# Altium PCB TEST_HJ-185-REV-B.PcbDoc
Units mm, origin at the board's own origin, x right, y up, seen from the top; angles counter-clockwise.
Board outline 35 x 25 mm, 2 copper layers (Component Side, Bottom Layer), stack 0.325 mm thick; 44 components, 39 nets, 150 pads, 46 vias.
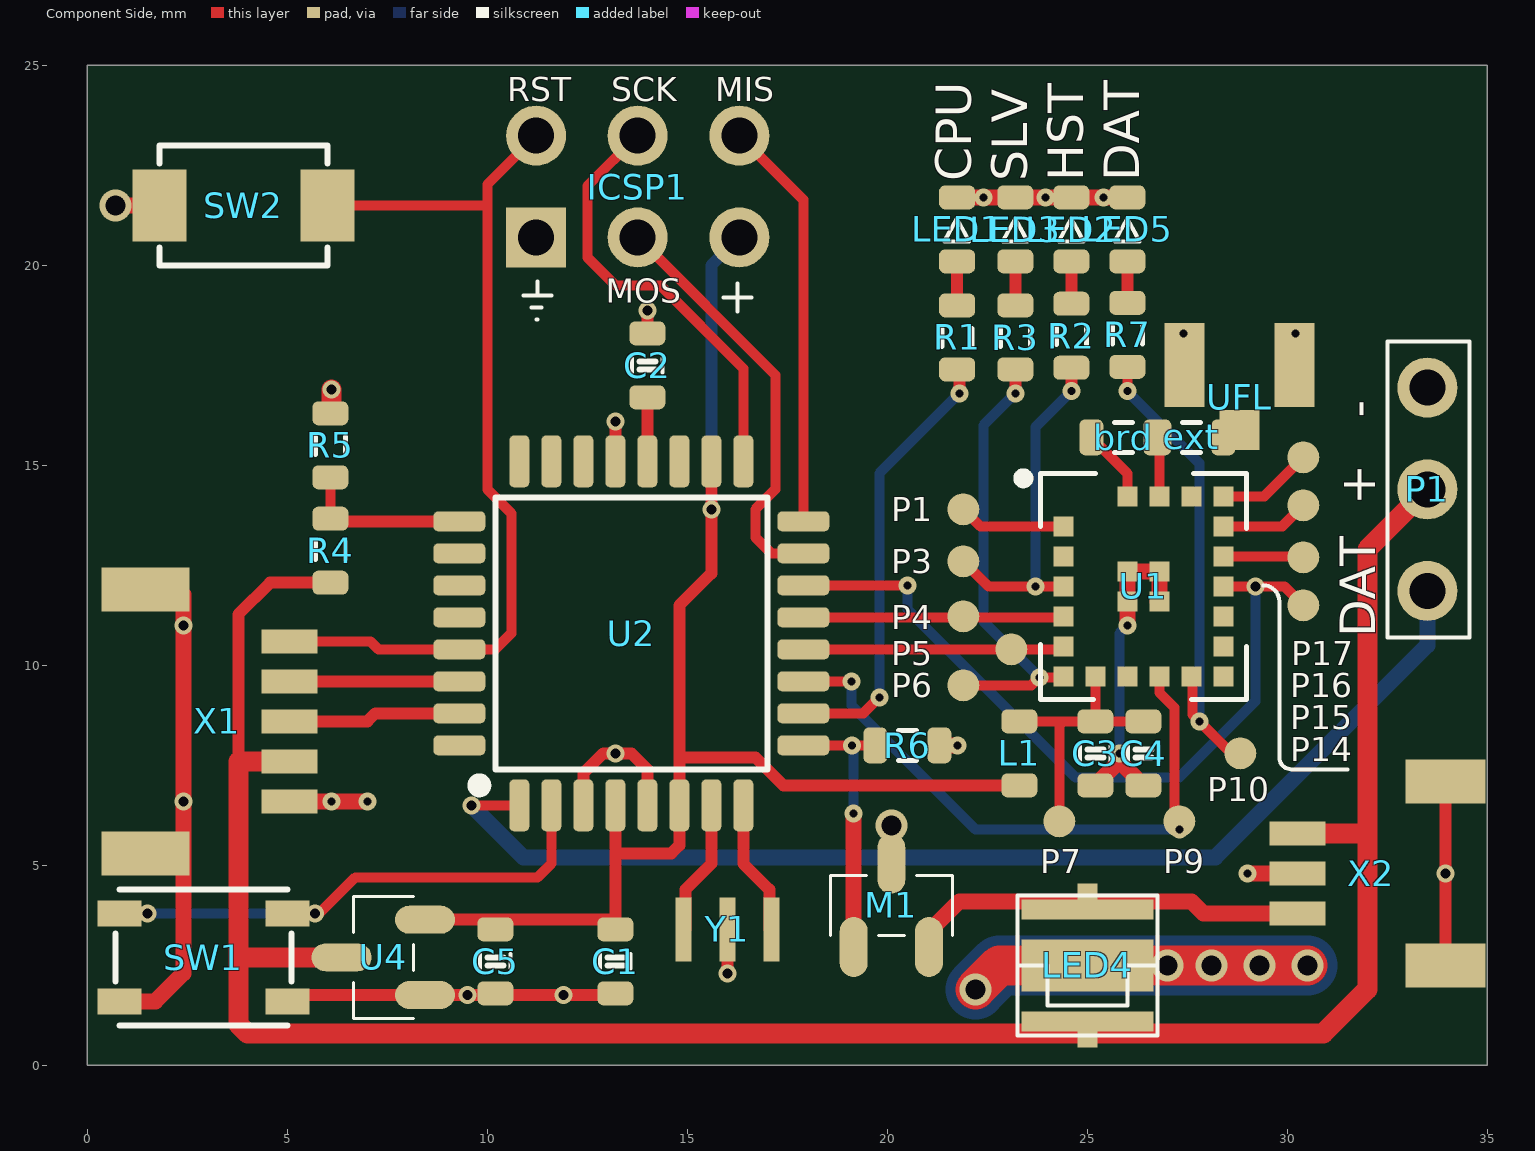
[diagram p0: Component Side view]
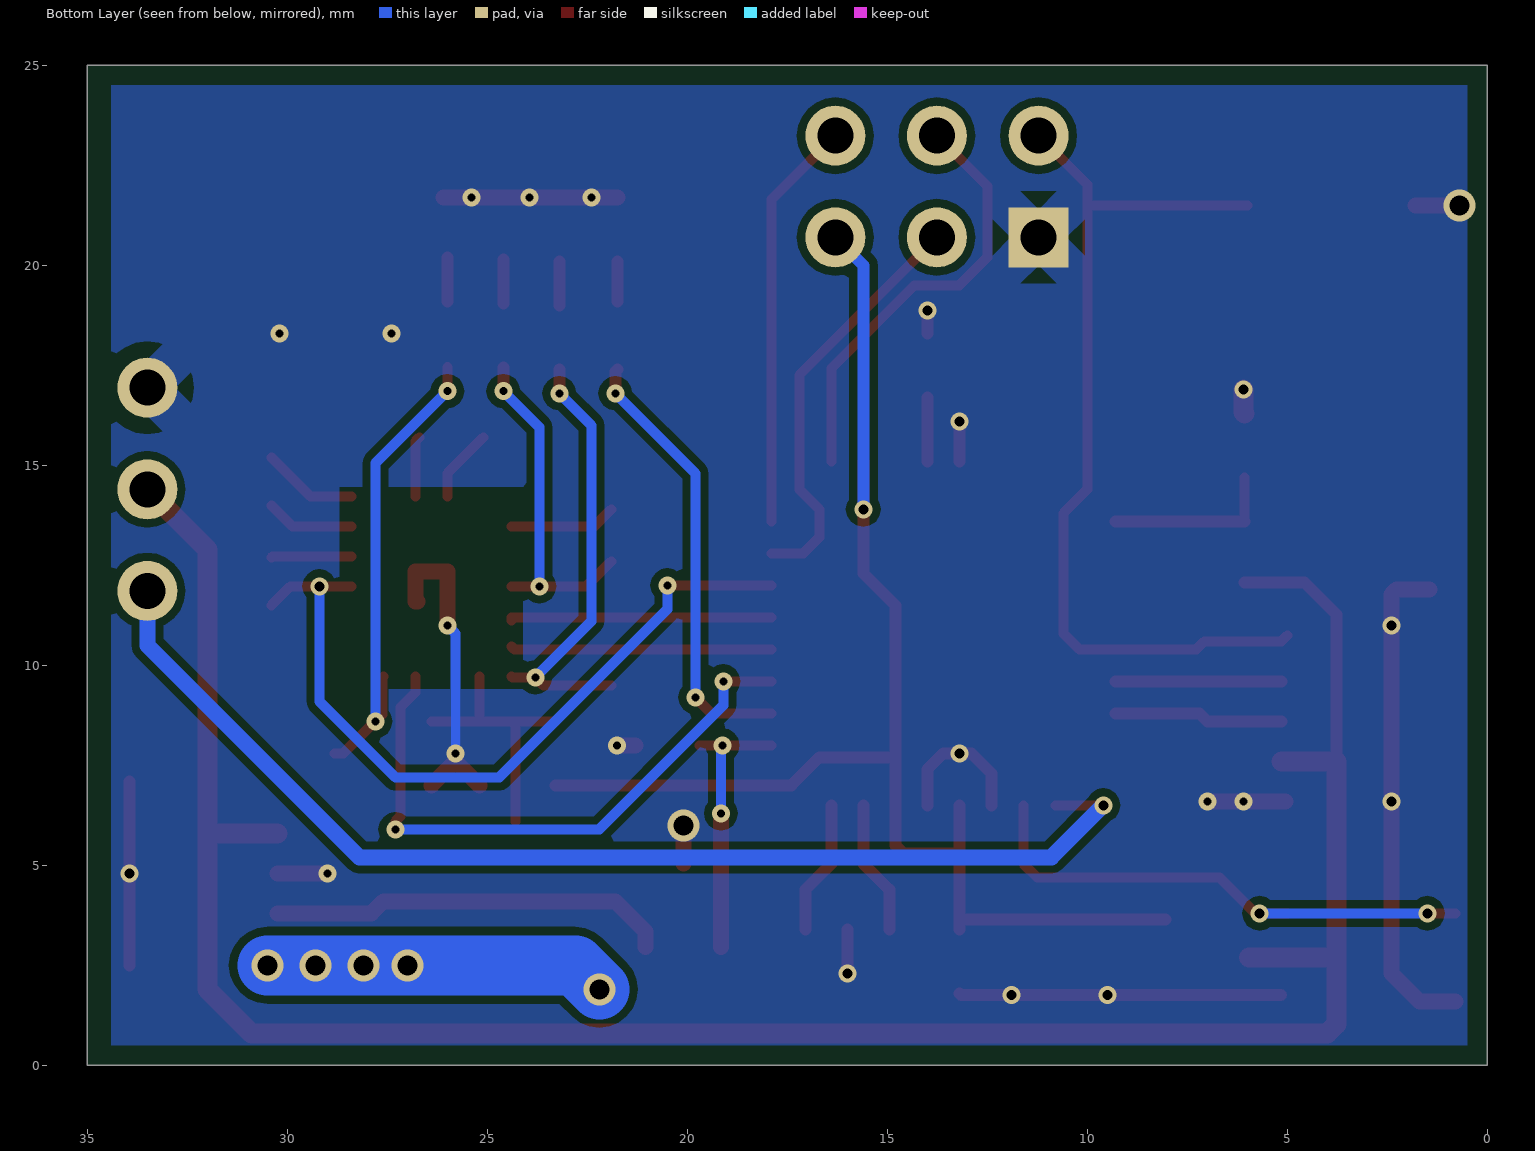
[diagram p1: Bottom Layer view, seen from below]
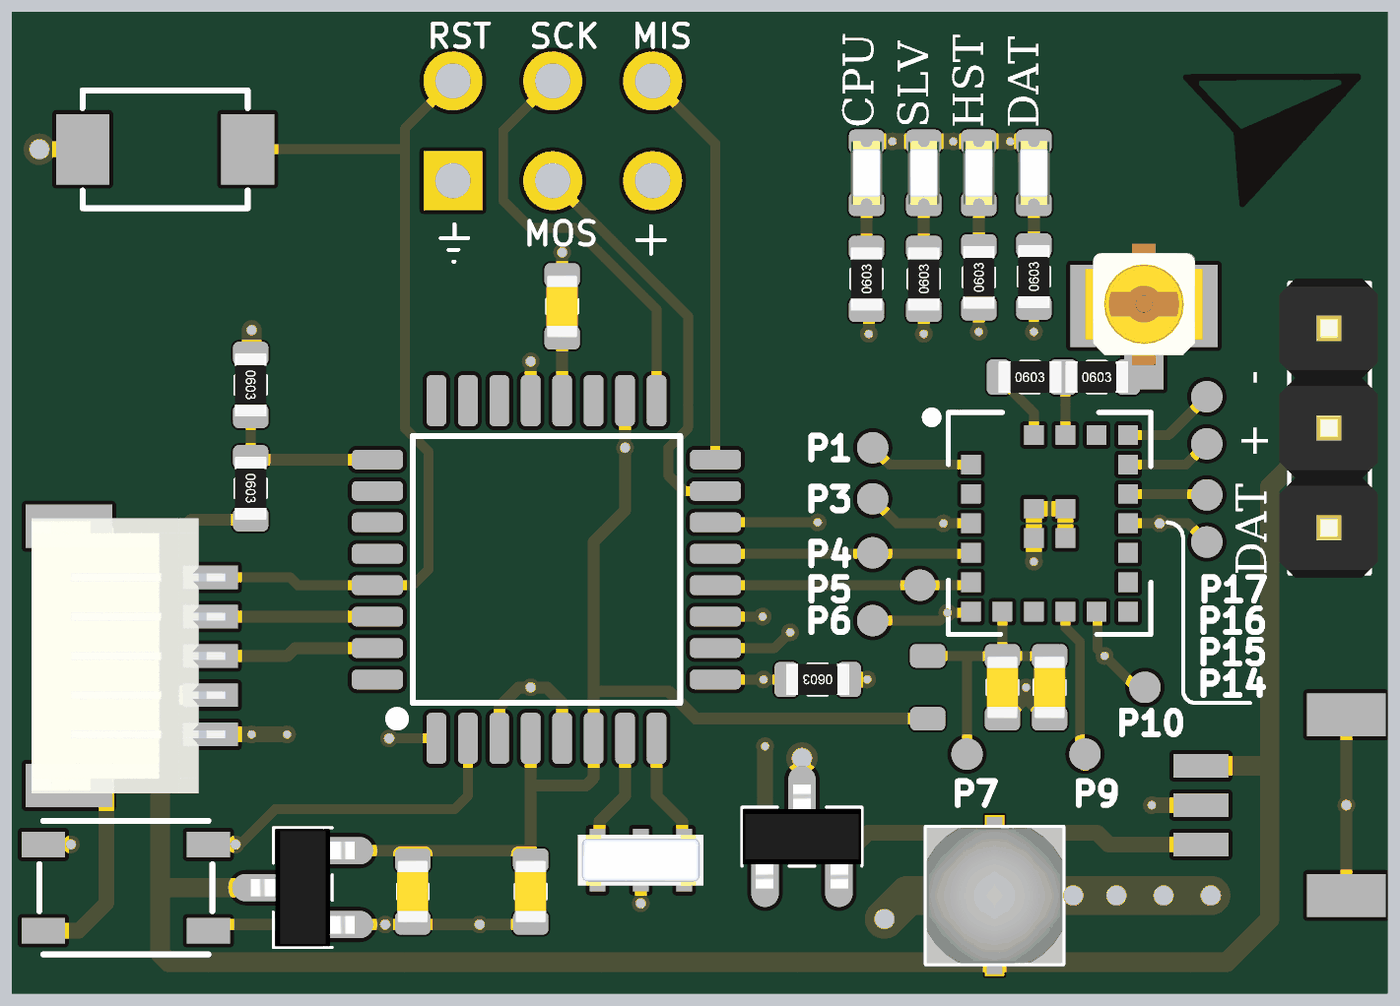
[diagram p2: 3D render of the assembled board from above, using the file's embedded part models]

## Layer stack, top to bottom
Top Solder: solder mask 0.0102, Solder Resist, Dk 3.5
Component Side: signal copper 0.0356
Dielectric 1: core 0.254, FR-4, Dk 4.2
Bottom Layer: signal copper 0.0356
Solder Side: solder mask 0.0102, Solder Resist, Dk 3.5

## Board outline
0,0 35,0 35,25 0,25

## Design rules (kind name [scope] priority, off if disabled: settings)
Clearance Clearance_GND_GND [InNet('GND') vs InNet('GND')] p1: gap=0
Clearance [All] p2: gap=0.2
ComponentClearance [All] p1: gap=0.1 collisioncheckmode=3 verticalgap=0.254 showdistances=FALSE
HoleSize [All] p1: absolutevalues=TRUE maxlimit=10 minlimit=0.025 maxpercent=80.000 minpercent=20.000
MinimumSolderMaskSliver [All] p1 off: minsoldermaskwidth=0.1
PlaneClearance [All] p1: clearance=0
PolygonConnect [All] p1: connectstyle=Relief reliefconductorwidth=0.254 reliefentries=4 polygonreliefangle="45 Angle" airgapwidth=0.254
RoutingVias [All] p1: holewidth=0.6 width=0.9 viastyle="Through Hole" minholewidth=0.3 minwidth=0.5 maxholewidth=0.9 maxwidth=1.2
SilkToSilkClearance [All] p1 off: silktosilkclearance=0.1
SilkToSolderMaskClearance SilkscreenOverComponentPads [IsPad] p1 off: minsilkscreentomaskgap=0.1 clearancetoexposedcopper=TRUE
SolderMaskExpansion [All] p1: expansion=0.102
Width [All] p1: maxlimit=10 minlimit=0.15 preferedwidth=0.3
24 further rules are at their usual default settings.

## Components (designator, comment, footprint, x,y, rotation, side; value= is the part's Value field where it differs from the comment)
brd "430R" R0603-FFT 25.9,15.7 r0 top
C1 "0.1uF" C0603-FFT 13.2,2.6 r90 top
C2 "0.1uF" C0603-FFT 14,17.5 r90 top
C3 "1uF" C0603-FFT 25.2,7.8 r90 top
C4 "0.1uF" C0603-FFT 26.4,7.8 r90 top
C5 "1uF" C0603-FFT 10.2,2.6 r90 top
ext "430R" R0603-FFT 27.6,15.7 r0 top
ICSP1 "Progr ICSP" "ICSP PRG PIN 2.54MM" 13.76,21.97 r270 top
L1 "10uH" L0603 23.3,7.8 r90 top
LED1 "Yellow" LED0603 21.743,20.9 r270 top
LED2 "Yellow" LED0603 24.6,20.9 r270 top
LED3 "Yellow" LED0603 23.2,20.9 r270 top
LED4 "Cool White" "CREE XPL" 25,2.5 r270 top
LED5 "Yellow" LED0603 26,20.9 r270 top
M1 "2.3A" SOT23-3 20.1,4 r0 top
P1 "3ipn" HDR1X3 33.5,14.4 r90 top
P1 "?" "Test Point" 21.9,13.9 r0 top
P3 "?" "Test Point" 21.9,12.6 r0 top
P4 "?" "Test Point" 21.9,11.225 r0 top
P5 "?" "Test Point" 23.1,10.4 r0 top
P6 "?" "Test Point" 21.9,9.5 r0 top
P7 "?" "Test Point" 24.3,6.1 r0 top
P9 "?" "Test Point" 27.3,6.1 r0 top
P10 "?" "Test Point" 28.825,7.8 r90 top
P14 "?" "Test Point" 30.4,11.5 r90 top
P15 "?" "Test Point" 30.4,12.7 r90 top
P16 "?" "Test Point" 30.4,14 r90 top
P17 "?" "Test Point" 30.4,15.2 r90 top
R1 "430R" R0603-FFT 21.743,18.2 r90 top
R2 "430R" R0603-FFT 24.6,18.24 r90 top
R3 "430R" R0603-FFT 23.2,18.2 r90 top
R4 "300K" R0603-FFT 6.076,12.869 r270 top
R5 "10k" R0603-FFT 6.076,15.5 r270 top
R6 "10k" R0603-FFT 20.5,8 r180 top
R7 "430R" R0603-FFT 26,18.26 r90 top
SW1 "=Value" "SWITCH TACTILE SKRPACE010" 2.9,2.7 r0 top
SW2 "=Value" "SWITCH TACTILE TS-1088C" 3.9,21.5 r180 top
U1 "BLE 5.1" LGA-24-FFT 26.4,11.975 r0 top locked
U2 "=Value" "32-PIN QFP 10MM" 13.6,10.8 r90 top
U4 "3.3v" SOT23-3 7.4,2.7 r90 top
UFL "UFL-simple" UFL 28.8,16.7 r270 top locked
X1 "1.0mm 5pin" "JST 5PIN 1MM" 3.2,8.6 r270 top
X2 "1.0mm 3pin" "JST 3PIN 1MM" 32.1,4.8 r90 top
Y1 "CSTCE8M0V53-R0" OSC_CSTCE16M0V53-R0 16,3.4 r0 top

## Footprints (in the part's own frame and the unit in brackets; to place one, negate y for a bottom-side part, rotate by r counter-clockwise, add the part's x,y. Pads: shape width x height; smd on the part's side, far side on the other; paste and mask are expansions set on the pad)
"32-PIN QFP 10MM" [mm]
  rrect50% 1.3x0.5 smd: 1(-4.3,2.8) 2(-4.3,2) 3(-4.3,1.2) 4(-4.3,0.4) 5(-4.3,-0.4) 6(-4.3,-1.2) 7(-4.3,-2) 8(-4.3,-2.8) 17(4.3,-2.8) 18(4.3,-2) 19(4.3,-1.2) 20(4.3,-0.4) 21(4.3,0.4) 22(4.3,1.2) 23(4.3,2) 24(4.3,2.8)
  rrect50% 0.5x1.3 smd: 9(-2.8,-4.3) 10(-2,-4.3) 11(-1.2,-4.3) 12(-0.4,-4.3) 13(0.4,-4.3) 14(1.2,-4.3) 15(2,-4.3) 16(2.8,-4.3) 25(2.8,4.3) 26(2,4.3) 27(1.2,4.3) 28(0.4,4.3) 29(-0.4,4.3) 30(-1.2,4.3) 31(-2,4.3) 32(-2.8,4.3)
  silkscreen extent -3.95,-3.4 3.4,3.95, body extent -3.37,-3.37 3.37,3.37, height 1
C0603-FFT [mm] "Capacitor 0603 body"
  rrect50% 0.6x0.9 smd mask+0.05: 1(-0.8,0) 2(0.8,0)
  silkscreen extent -0.18,-0.38 0.18,0.38, body extent -0.8,-0.4 0.8,0.4, height 0.86
"CREE XPL" [mm] "XPL LED"
  rect 0.5x3.3 smd paste-0.05 mask+0.05: A(1.4,0) K(-1.4,0)
  rect 0.5x0.5 smd paste-0.05 mask+0.05: A(1.8,0) K(-1.8,0)
  rect 1.3x3.3 smd paste-0.05 mask+0.05: PAD(0,0)
  silkscreen extent -1.75,-1.75 1.75,1.75, body extent -1.72,-1.72 1.73,1.73, height 2.65
HDR1X3 [mm] "Connector; Pin Header; 3 Position"
  round 1.5 hole 0.9: 1(-2.54,0) 2(0,0) 3(2.54,0)
  silkscreen extent -3.7,-1.05 3.7,1, body extent -3.81,-1.25 3.81,1.25, height 10.64
"ICSP PRG PIN 2.54MM" [mm] "pads only"
  round 1.5 hole 0.9: 1(-1.27,2.54) 2(1.27,2.54) 3(-1.27,0) 4(1.27,0) 5(-1.27,-2.54)
  rect 1.5x1.5 hole 0.9: 6(1.27,-2.54)
  silkscreen extent 2.38,-2.85 3.33,2.85
"JST 3PIN 1MM" [mm] "SMD"
  rect 0.6x1.4 smd: 1(-1,1.85) 2(0,1.85) 3(1,1.85)
  rect 1.1x2 smd: 6(-2.3,-1.85) 6(2.3,-1.85)
  body extent -2.5,-2.7 2.5,2.25, height 2.95
"JST 5PIN 1MM" [mm] "SMD"
  rect 0.6x1.4 smd: 1(-2,1.85) 2(-1,1.85) 3(0,1.85) 4(1,1.85) 5(2,1.85)
  rect 1.1x2.2 smd: 6(-3.3,-1.75) 6(3.3,-1.75)
  body extent -3.5,-2.7 3.5,2.25, height 2.9
L0603 [mm] "SMD"
  rrect50% 0.6x0.9 smd mask+0.05: 1(-0.8,0) 2(0.8,0)
  body extent -1.06,-0.37 1.06,0.38, height 0.5
LED0603 [mm] "LED 0603"
  rrect50% 0.6x0.9 smd mask+0.05: A(0.8,0) C(-0.8,0)
  silkscreen extent -0.27,-0.31 0.3,0.31, body extent -0.81,-0.4 0.81,0.4, height 0.6
LGA-24-FFT [mm] "HJ-185 FOOTPRINT"
  rect 0.5x0.5 smd: 1(-2,1.5) 2(-2,0.75) 3(-2,0) 4(-2,-0.75) 5(-2,-1.5) 6(-2,-2.25) 7(-1.2,-2.25) 8(-0.4,-2.25) 9(0.4,-2.25) 10(1.2,-2.25) 11(2,-2.25) 12(2,-1.5) 13(2,-0.75) 14(2,0) 15(2,0.75) 16(2,1.5) 17(2,2.25) 18(1.2,2.25) 19(0.4,2.25) 20(-0.4,2.25) 21(-0.4,-0.375) 21(-0.4,0.375) 21(0.4,-0.375) 21(0.4,0.375)
  silkscreen extent -3.1,-2.83 2.58,2.83, body extent -2.5,-2.75 2.5,2.75, height 1.31
OSC_CSTCE16M0V53-R0 [mm]
  rect 0.4x1.6 smd: 1(-1.1,0) 2(0,0) 3(1.1,0)
  body extent -1.6,-0.65 1.6,0.65, height 1
R0603-FFT [mm] "Resistor 0603 SMD pad"
  rrect50% 0.6x0.9 smd mask+0.05: 1(-0.8,0) 2(0.8,0)
  silkscreen extent -0.23,-0.38 0.23,0.38, body extent -0.8,-0.4 0.8,0.4, height 0.45
SOT23-3 [mm] "SOT23 3pin"
  oval 0.7x1.5 smd: 1(-0.94,-1.043) 2(0.94,-1.043) 3(0,1.043)
  silkscreen extent -1.52,-0.75 1.52,0.75, body extent -1.5,-1.32 1.5,1.32, height 1.08
"SWITCH TACTILE SKRPACE010" [mm] "white tactile switch 3.2x4.x2mm"
  rect 1.1x0.65 smd: 1(-2.1,1.1) 1(2.1,1.1) 2(-2.1,-1.1) 2(2.1,-1.1)
  silkscreen extent -2.2,-1.7 2.2,1.7, body extent -2.1,-1.6 2.1,1.6, height 2.5
"SWITCH TACTILE TS-1088C" [mm] "Tactile switch 3x4x2.5mm"
  rect 1.35x1.8 smd: 1(-2.1,0) 2(2.1,0)
  silkscreen extent -2.1,-1.5 2.1,1.5, body extent -2.6,-1.45 2.6,1.45, height 2
"Test Point" [mm] "Testpoint"
  round 0.8 smd: 1(0,0)
UFL [mm] "Connector"
  rect 1x1 smd: 1(0.812,0)
  rect 2.1x1 smd: 2(-0.813,-1.375) 3(-0.813,1.375)
  body extent -2.41,-1.5 0.69,1.5, height 1.25

## Part data
brd ext: library part R0603_430, "Resistor 0603"
C1 C2 C4: library part C0603_0.1uF_50V, "C0603_0.1uF_50V"
C3 C5: library part C0603_1uF_25V, "C0603_1uF_25V"
ICSP1: "PAD prog"
L1: library part L0603_10uH, "Inductor"
LED1 LED2 LED3 LED5: library part 19-213/Y2C-CQ2R2L/3T(CY), "LED 0603 chip"
LED4: library part XPL, "LED"
M1: library part IRLML0030, "MOSFET N-Channel"
P1: library part "Header 3x1", "Header 3x1-PIN, 2.54mm"
P1 P3 P4 P5 P6 P7 P9 P10 P14 P15 P16 P17: library part "Test Point", "Test Point"
R1 R2 R3 R7: library part R0603_430, "SMD resistor"
R4: library part R0603_300k, "SMD resistor"
R5 R6: library part R0603_10k, "SMD resistor"
SW1: library part SKRPACE010, "Switch Tactile"
SW2: library part TS-1088C-02526, "Switch Tactile"
U1: library part HJ-185MH, "Module BLE"
U2: library part "Atmega 328P-AU", "MCU"
U4: library part AP2210N-3.3TRG1, "LDO 3.3V 300mA"
UFL: library part "UFL - simple", "Connector UFL antenna"
X1: library part SM05B-FFT, "Connector 5p hor 1mm"
X2: library part SM03B-SRSS-TB, "Connector 3p hor 1mm"
Y1: "Ceramic Resonator 8Mhz"

## Via types
v1: diameter 0.45, hole 0.2, Component Side to Bottom Layer, tented both sides, 24 vias
v2: diameter 0.45, hole 0.25, Component Side to Bottom Layer, tented both sides, 15 vias
v3: diameter 0.8, hole 0.5, Component Side to Bottom Layer, tented both sides, 7 vias

## Nets (pads, with @x,y where several pads share a name; then routed paths per layer and width w, separated by ;. In a path a pad name is that pad's centre, name@x,y a point inside that pad or via, vN(x,y) a via of type N, cw(c..) or ccw(c..) an arc to the next point about the centre after c; other vN are vias at no path point)
3.3V: C1.2 C5.2 ICSP1.2 L1.1 U2.4 U2.6 U2.18 U4.2 | length 35.8
  Component Side w0.3: U4.2@8.043,3.64 U4.2 C1.2@13.2,3.64 ; C1.2 C1.2@13.2,3.64 ; U2.4 13.2,5.3 ; U2.18 v2(15.6,13.9) 15.6,12.3 14.8,11.5 14.8,7.7 ; L1.1 17.4,7 16.7,7.7 14.8,7.7 ; C1.2@13.2,3.64 13.2,5.3 ; 13.2,5.3 14.6,5.3 14.8,5.5 U2.6 14.8,7.7
  Bottom Layer w0.3: v2(15.6,13.9) 15.6,20 ICSP1.2
BLE_CONFIG: P14.1 U1.14 U2.14 | length 19.5
  Component Side w0.25: U2.14 v1(20.5,12) ; U1.14 v2(29.2,11.975) 29.925,11.975 P14.1
  Bottom Layer w0.25: v1(20.5,12) 20.5,11.4 24.7,7.2 27.3,7.2 29.2,9.1 v2(29.2,11.975)
BLE_RX: P5.1 U1.5 U2.12 | length 6.5
  Component Side w0.25: U2.12 P5.1 24.325,10.4 U1.5
BLE_SERIAL_ENABLE: P9.1 U1.9 U2.11 | length 15.1
  Component Side w0.25: U2.11 v1(19.1,9.6) ; U1.9 26.8,9.322 27.175,8.947 27.175,6.225 P9.1
  Bottom Layer w0.25: v1(19.1,9.6) 19.1,9 22.2,5.9 v1(27.3,5.9)
BLE_TX: P4.1 U1.4 U2.13 | length 6.6
  Component Side w0.25: U2.13 U1.4@24.325,11.2 ; U1.4@24.4,11.125 U1.4@24.325,11.2 ; U1.4@24.4,11.2 U1.4@24.325,11.2
BUT: SW1.1 U2.2 | length 13.5
  Component Side w0.25: SW1.1@0.8,3.8 v2(1.5,3.8) ; SW1.1@5,3.8 v2(5.69,3.8) 5.8,3.8 6.7,4.7 11.26,4.7 11.6,5.04 U2.2
  Bottom Layer w0.25: v2(1.5,3.8) v2(5.69,3.8)
DAT: P10.1 R7.1 U1.10 | length 12.2
  Component Side w0.25: v1(26,16.853) R7.1 ; U1.10 27.625,9.7 27.625,8.775 v1(27.8,8.6) 28.6,7.8 P10.1
  Bottom Layer w0.25: v1(26,16.853) 27.8,15.053 v1(27.8,8.6)
GND: C1.1 C2.2 C3.1 C4.1 C5.1 ICSP1.6 LED1.C LED2.C LED3.C LED5.C M1.3 P1.3 R5.1 R6.1 SW1.2 SW2.2 U1.21 U2.3 U2.5 U2.21 U4.1 UFL.2 UFL.3 X1.5 X1.6 X2.2 X2.6 Y1.2 | length 50.4
  Component Side w0.3: SW1.2@5.16,1.76 U4.1 v2(9.5,1.76) v2(11.9,1.76) 13.16,1.76 C1.1 ; U2.3 12.4,7.3 12.9,7.8 v2(13.2,7.8) 13.6,7.8 14,7.4 U2.5 ; U2.21 v2(13.2,16.1) ; C2.2 v2(14,18.875) ; v2(16,2.3) Y1.2 ; X2.6@33.95,2.5 v2(33.95,4.8) X2.6@33.95,7.1
  Component Side w0.4: v3(0.7,21.5) SW2.2 ; SW1.2@0.8,1.6 1.7,1.6 2.4,2.3 v2(2.4,6.6) v2(2.4,11) 2.4,11.776 2.276,11.9 X1.6@1.45,11.9 ; X1.5 v1(6.1,6.6) v1(7,6.6) ; M1.3 v3(20.1,6) ; R6.1 v1(21.76,8) ; LED1.C v1(22.4,21.7) LED3.C v1(23.95,21.7) LED2.C v1(25.4,21.7) LED5.C LED5.C@26.1,21.7 ; C3.1 v1@25.8,7.6 ; v1(26,11) 26,11.6 26,12.35 26.8,12.35 26.8,11.6 U1.21@26.75,11.6 ; C4.1 v1@25.8,7.6 ; v1(29,4.8) X2.2 ; v1@25.8,7.6 v1(25.8,7.8) v1@25.8,7.6
  Component Side w0.5: R5.1 6.1,16.324 v2(6.1,16.9)
  Bottom Layer w0.25: v1(25.8,7.8) 25.8,10.8 v1(26,11)
  other v1: 27.4,18.3 30.2,18.3
HST: P3.1 R2.1 U1.3 | length 8.6
  Component Side w0.25: P3.1 22.525,11.975 v1(23.7,11.975) U1.3
  Component Side w0.3: v1(24.6,16.853) R2.1
  Bottom Layer w0.25: v1(23.7,11.975) 23.7,15.953 v1(24.6,16.853)
LED_STATUS: R1.1 U2.10 | length 11.1
  Component Side w0.25: U2.10 19.4,8.8 v1(19.8,9.2)
  Component Side w0.3: R1.1 21.8,17.343 v1(21.8,16.8)
  Bottom Layer w0.25: v1(19.8,9.2) 19.8,14.8 v1(21.8,16.8)
MISO: ICSP1.1 U2.16 | length 10.3
  Component Side w0.25: ICSP1.1 17.9,21.64 U2.16
MOSI: ICSP1.4 U2.15 | length 10.5
  Component Side w0.25: ICSP1.4 17.2,17.26 17.2,14.4 16.7,13.9 16.7,13.2 17.1,12.8 U2.15
Netbrd_1: brd.1 U1.20 | length 1.8
  Component Side w0.25: brd.1 26,14.8 U1.20
Netbrd_2: brd.2 ext.1 U1.19 | length 1.5
  Component Side w0.25: brd.2 26.8,15.6 U1.19
NetC2_1: C2.1 U2.20 | length 1.6
  Component Side w0.3: U2.20 C2.1
NetC3_2: C3.2 C4.2 L1.2 P7.1 U1.7 | length 6.8
  Component Side w0.25: L1.2 24.4,8.6 ; P7.1 24.3,8.5 24.4,8.6 ; U1.7 C3.2 ; C4.2 C3.2 ; 24.4,8.6 C3.2
Netext_2: ext.2 UFL.1
NetLED1_A: LED1.A R1.2 | length 1
  Component Side w0.3: R1.2@21.743,19.1 LED1.A
NetLED2_A: LED2.A R2.2 | length 1.1
  Component Side w0.3: R2.2 LED2.A@24.6,20.14
NetLED3_A: LED3.A R3.2 | length 1.1
  Component Side w0.3: R3.2 LED3.A
NetLED4_K: LED4.K M1.2 X2.1 | length 10
  Component Side w0.4: M1.2 21.04,3.34 21.8,4.1 27.6,4.1 27.9,3.8 X2.1
NetLED5_A: LED5.A R7.2 | length 1.1
  Component Side w0.3: R7.2@26,19.1 LED5.A@26,20.2
NetP1_1: P1.1@21.9,13.9 U1.1 | length 2.7
  Component Side w0.25: P1.1@21.9,13.9 22.325,13.475 U1.1
NetP15_1: P15.1 U1.15 | length 2
  Component Side w0.25: U1.15 30.375,12.725 P15.1
NetP16_1: P16.1 U1.16 | length 2.2
  Component Side w0.25: U1.16 29.875,13.475 P16.1
NetP17_1: P17.1 U1.17 | length 2.4
  Component Side w0.25: U1.17 29.425,14.225 P17.1
NetU2_7: U2.7 Y1.1 | length 3.4
  Component Side w0.3: Y1.1@14.95,3.4 14.95,4.39 15.6,5.04 15.6,5.54 U2.7
NetU2_8: U2.8 Y1.3 | length 3.4
  Component Side w0.3: U2.8 16.4,5.54 16.4,5.04 17.05,4.39 Y1.3@17.05,3.4
RESET: ICSP1.5 SW2.1 U2.29 X1.1 | length 23.1
  Component Side w0.25: X1.1@5,10.75 5.15,10.6 7.075,10.6 7.275,10.4 U2.29 10.2,10.4 10.6,10.8 10.6,13.8 10,14.4 10,21.5 ; SW2.1 10,21.5 ; ICSP1.5 10,22.02 10,21.5
RX: U2.30 X1.2 | length 4.1
  Component Side w0.3: X1.2@5.15,9.6 U2.30
SCK: ICSP1.3 U2.17 | length 10.9
  Component Side w0.25: ICSP1.3 12.5,21.98 12.5,20.2 13.2,19.5 14.324,19.5 16.4,17.424 U2.17
SCL: U2.28
SDA: U2.27
SERVO: P1.1@33.5,11.86 U2.1 | length 29.2
  Component Side w0.25: v2(9.6,6.5) U2.1
  Bottom Layer w0.4: v2(9.6,6.5) 10.9,5.2 28.2,5.2 33.5,10.5 P1.1@33.5,11.86
SLV: P6.1 R3.1 U1.6 | length 11.2
  Component Side w0.25: P6.1 23.6,9.5 v1(23.8,9.7) 24.375,9.7 U1.6
  Component Side w0.3: v1(23.2,16.8) R3.1
  Bottom Layer w0.25: v1(23.2,16.8) 22.4,16 22.4,11.1 v1(23.8,9.7)
STROBE: M1.1 R6.2 U2.9 | length 6.9
  Component Side w0.25: U2.9 v1(19.12,8) ; v1@19.16,7.96 v1(19.12,8) ; R6.2 v1(19.12,8)
  Component Side w0.4: M1.1 v1(19.16,6.3)
  Bottom Layer w0.25: v1(19.12,8) 19.16,7.96 v1(19.16,6.3)
TX: U2.31 X1.3 | length 4.2
  Component Side w0.3: X1.3@5.15,8.6 7,8.6 7.2,8.8 U2.31
VIN: LED4.A P1.2 R4.2 U4.3 X1.4 X2.3 | length 60.1
  Component Side w0.3: 3.776,7.6 3.776,11.276 4.569,12.069 R4.2
  Component Side w0.5: X1.4@5.15,7.6 X1.4 3.776,7.6 3.776,2.7 ; U4.3@5.957,2.7 3.776,2.7 ; X2.3 32,5.8 ; P1.2 32,12.9 32,5.8 ; 3.776,2.7 3.776,1.024 4,0.8 30.9,0.8 32,1.9 32,5.8
VOLTMETER: R4.1 R5.2 U2.25 | length 4.3
  Component Side w0.25: R4.1 6.076,14.184 R5.2
  Component Side w0.3: R4.1@6.076,13.6 U2.25
pads on no net: LED4.PAD U1.2 U1.8 U1.11 U1.12 U1.13 U1.18 U2.19 U2.22 U2.23 U2.24 U2.26 U2.32
copper on no net: | length 17.9
  Component Side w1: v3(30.5,2.5) 22.8,2.5 ; 22.8,2.5 v3(22.2,1.9) 22.8,2.5
  Bottom Layer w1.5: v3(22.2,1.9) 22.8,2.5 v3(30.5,2.5)
  other v3: 27,2.5 28.1,2.5 29.3,2.5

## Polygon pours and split planes (outlines as drawn)
GND on Bottom Layer "Bottom Layer-GND" (solid, pour order 8): 0.5,24.5 34.4,24.5 34.4,0.5 0.5,0.5

## Other copper
Bottom Layer:
  pour cut-out: 24.1,14.47 28.7,14.47 28.7,9.4 24.1,9.4

## Silkscreen, mask and mechanical layers (free items; w line width, h text height)
Top Overlay:
  lines w0.1: 29.4,12 cw(c29.4,11.6) 29.8,11.6 29.8,7.7 ccw(c30.1,7.7) 30.1,7.4 31.5,7.4
  text "CPU" at 22.4,22.1 h1.52 r90
  text "SLV" at 23.8,22.1 h1.52 r90
  text "HST" at 25.2,22.1 h1.52 r90
  text "DAT" at 26.6,22.1 h1.52 r90
  text "DAT  +   -" at 32.5,10.7 h1.52 r90
Top Solder:
  region: 891 vertices and 1 holes, not listed, extent 29.783,20.027 34.321,23.43
Mechanical 2:
  the board outline again, w0.2

## Dimensions
0,0 to 0,25 on Mechanical 16
0,0 to 35,0 on Mechanical 16

## Text inside footprints (layer, text, board x,y; h text height)
ICSP1: Top Overlay "RST" at 10.5,24.1 h0.6; Top Overlay "SCK" at 13.1,24.1 h0.6; Top Overlay "MOS" at 12.96,19.07 h0.6; Top Overlay "MIS" at 15.7,24.1 h0.6